# Altium PCB Route_Guide_and_Tuning.PcbDoc (part 4 of 8)
Units mil, origin at the board's own origin, x right, y up, seen from the top; angles counter-clockwise.
Board outline 3600 x 2300 mil, 14 copper layers (L1 TOP, L2_G, L3 SIG, L4_G, L4 SIG, L6_P, L7_G, L10_P, L11_P, L7 SIG, L13_P, L8 SIG, L15_G, L10 BOT), stack 89.291 mil thick; 4 components, 1934 nets, 2174 pads, 2165 vias.
Unrouted connection lines stored in the file: 123.
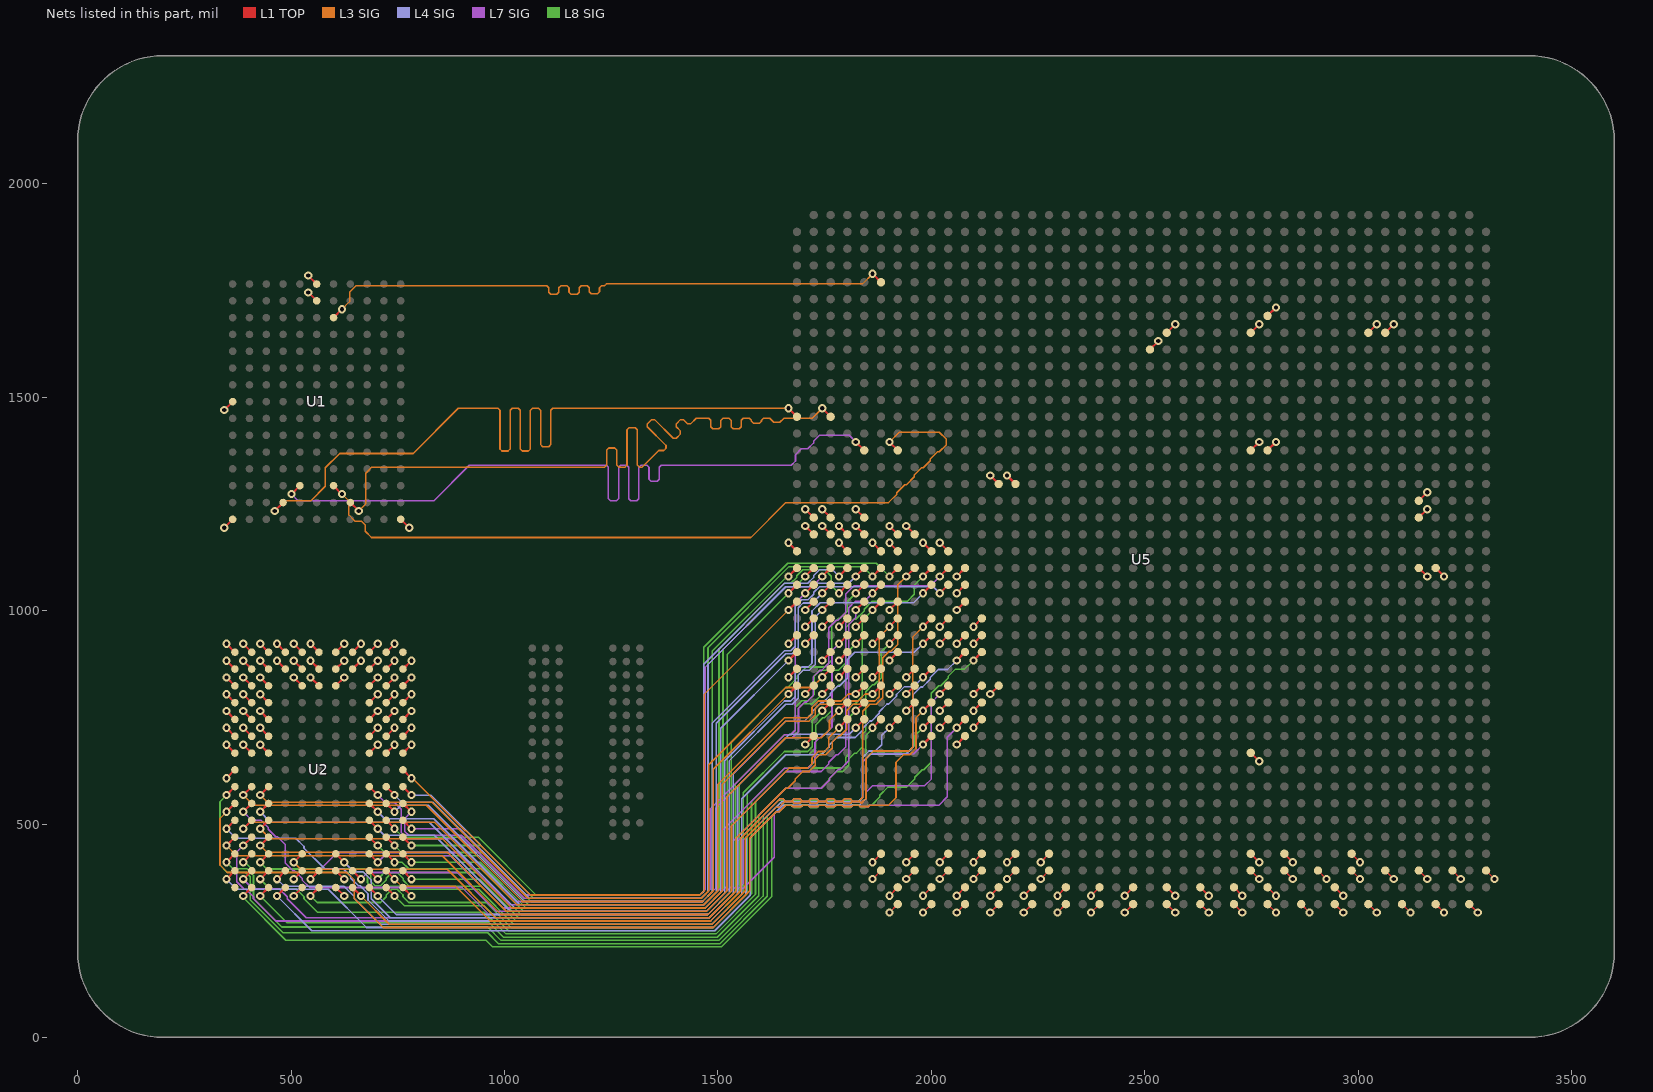
[diagram p16: the nets of this part, all layers, seen from the top]

## Via types
v1: diameter 19.4, hole 10, L1 TOP to L10 BOT, 2087 vias
v2: diameter 18.6, hole 10, L1 TOP to L10 BOT, tented both sides, 78 vias

## Nets (pads, with @x,y where several pads share a name; then routed paths per layer and width w, separated by ;. In a path a pad name is that pad's centre, name@x,y a point inside that pad or via, vN(x,y) a via of type N, cw(c..) or ccw(c..) an arc to the next point about the centre after c; other vN are vias at no path point) (continued)
MGT_TX_N10: U5.AN2 | length 27.8
  L1 TOP w3.8: U5.AN2@2945,351.65 v1(2964.69,331.97)
MGT_TX_N11: U5.AP4 | length 27.8
  L1 TOP w3.8: U5.AP4@2984.37,430.39 v1(3004.06,410.71)
MGT_TX_N12: U5.AG2 | length 27.8
  L1 TOP w3.8: U5.AG2@2708.78,351.65 v1(2728.47,331.97)
MGT_TX_N13: U5.AH4 | length 27.8
  L1 TOP w3.8: U5.AH4@2748.15,430.39 v1(2767.84,410.71)
MGT_TX_N14: U5.AJ2 | length 27.8
  L1 TOP w3.8: U5.AJ2@2787.52,351.65 v1(2807.21,331.97)
MGT_TX_N15: U5.AK4 | length 27.8
  L1 TOP w3.8: U5.AK4@2826.89,430.39 v1(2846.58,410.71)
MGT_TX_N16: U5.W2 | length 27.8
  L1 TOP w3.8: v1(2374.13,331.97) U5.W2@2393.82,351.65
MGT_TX_N17: U5.AA2 | length 27.8
  L1 TOP w3.8: v1(2452.87,331.97) U5.AA2@2472.56,351.65
MGT_TX_N18: U5.AC2 | length 27.8
  L1 TOP w3.8: U5.AC2@2551.3,351.65 v1(2570.99,331.97)
MGT_TX_N19: U5.AE2 | length 27.8
  L1 TOP w3.8: U5.AE2@2630.04,351.65 v1(2649.73,331.97)
MGT_TX_N20: U5.P4 | length 27.8
  L1 TOP w3.8: v1(2177.28,410.71) U5.P4@2196.97,430.39
MGT_TX_N21: U5.R2 | length 27.8
  L1 TOP w3.8: v1(2216.65,331.97) U5.R2@2236.34,351.65
MGT_TX_N22: U5.T4 | length 27.8
  L1 TOP w3.8: v1(2256.02,410.71) U5.T4@2275.71,430.39
MGT_TX_N23: U5.U2 | length 27.8
  L1 TOP w3.8: v1(2295.39,331.97) U5.U2@2315.08,351.65
MGT_TX_N24: U5.K4 | length 27.8
  L1 TOP w3.8: v1(2019.8,410.71) U5.K4@2039.49,430.39
MGT_TX_N25: U5.L2 | length 27.8
  L1 TOP w3.8: v1(2059.17,331.97) U5.L2@2078.86,351.65
MGT_TX_N26: U5.M4 | length 27.8
  L1 TOP w3.8: v1(2098.54,410.71) U5.M4@2118.23,430.39
MGT_TX_N27: U5.N2 | length 27.8
  L1 TOP w3.8: v1(2137.91,331.97) U5.N2@2157.6,351.65
MGT_TX_N28: U5.F4 | length 27.8
  L1 TOP w3.8: v1(1862.32,410.71) U5.F4@1882.01,430.39
MGT_TX_N29: U5.G2 | length 27.8
  L1 TOP w3.8: v1(1901.69,331.97) U5.G2@1921.38,351.65
MGT_TX_N30: U5.H4 | length 27.8
  L1 TOP w3.8: v1(1941.06,410.71) U5.H4@1960.75,430.39
MGT_TX_N31: U5.J2 | length 27.8
  L1 TOP w3.8: v1(1980.43,331.97) U5.J2@2000.12,351.65
MGT_TX_P0: U5.AW1 | length 27.8
  L1 TOP w3.8: U5.AW1@3181.22,312.28 v1(3200.91,292.6)
MGT_TX_P1: U5.AY3 | length 27.8
  L1 TOP w3.8: U5.AY3@3220.59,391.02 v1(3240.28,371.34)
MGT_TX_P2: U5.BA1 | length 27.8
  L1 TOP w3.8: U5.BA1@3259.96,312.28 v1(3279.65,292.6)
MGT_TX_P3: U5.BB3 | length 27.8
  L1 TOP w3.8: U5.BB3@3299.33,391.02 v1(3319.02,371.34)
MGT_TX_P4: U5.AR1 | length 27.8
  L1 TOP w3.8: U5.AR1@3023.74,312.28 v1(3043.43,292.6)
MGT_TX_P5: U5.AT3 | length 27.8
  L1 TOP w3.8: U5.AT3@3063.11,391.02 v1(3082.8,371.34)
MGT_TX_P6: U5.AU1 | length 27.8
  L1 TOP w3.8: U5.AU1@3102.48,312.28 v1(3122.17,292.6)
MGT_TX_P7: U5.AV3 | length 27.8
  L1 TOP w3.8: U5.AV3@3141.85,391.02 v1(3161.54,371.34)
MGT_TX_P8: U5.AL1 | length 27.8
  L1 TOP w3.8: U5.AL1@2866.26,312.28 v1(2885.95,292.6)
MGT_TX_P9: U5.AM3 | length 27.8
  L1 TOP w3.8: U5.AM3@2905.63,391.02 v1(2925.32,371.34)
MGT_TX_P10: U5.AN1 | length 27.8
  L1 TOP w3.8: U5.AN1@2945,312.28 v1(2964.69,292.6)
MGT_TX_P11: U5.AP3 | length 27.8
  L1 TOP w3.8: U5.AP3@2984.37,391.02 v1(3004.06,371.34)
MGT_TX_P12: U5.AG1 | length 27.8
  L1 TOP w3.8: U5.AG1@2708.78,312.28 v1(2728.47,292.6)
MGT_TX_P13: U5.AH3 | length 27.8
  L1 TOP w3.8: U5.AH3@2748.15,391.02 v1(2767.84,371.34)
MGT_TX_P14: U5.AJ1 | length 27.8
  L1 TOP w3.8: U5.AJ1@2787.52,312.28 v1(2807.21,292.6)
MGT_TX_P15: U5.AK3 | length 27.8
  L1 TOP w3.8: U5.AK3@2826.89,391.02 v1(2846.58,371.34)
MGT_TX_P16: U5.W1 | length 27.8
  L1 TOP w3.8: v1(2374.13,292.6) U5.W1@2393.82,312.28
MGT_TX_P17: U5.AA1 | length 27.8
  L1 TOP w3.8: v1(2452.87,292.6) U5.AA1@2472.56,312.28
MGT_TX_P18: U5.AC1 | length 27.8
  L1 TOP w3.8: U5.AC1@2551.3,312.28 v1(2570.99,292.6)
MGT_TX_P19: U5.AE1 | length 27.8
  L1 TOP w3.8: U5.AE1@2630.04,312.28 v1(2649.73,292.6)
MGT_TX_P20: U5.P3 | length 27.8
  L1 TOP w3.8: v1(2177.28,371.34) U5.P3@2196.97,391.02
MGT_TX_P21: U5.R1 | length 27.8
  L1 TOP w3.8: v1(2216.65,292.6) U5.R1@2236.34,312.28
MGT_TX_P22: U5.T3 | length 27.8
  L1 TOP w3.8: v1(2256.02,371.34) U5.T3@2275.71,391.02
MGT_TX_P23: U5.U1 | length 27.8
  L1 TOP w3.8: v1(2295.39,292.6) U5.U1@2315.08,312.28
MGT_TX_P24: U5.K3 | length 27.8
  L1 TOP w3.8: v1(2019.8,371.34) U5.K3@2039.49,391.02
MGT_TX_P25: U5.L1 | length 27.8
  L1 TOP w3.8: v1(2059.17,292.6) U5.L1@2078.86,312.28
MGT_TX_P26: U5.M3 | length 27.8
  L1 TOP w3.8: v1(2098.54,371.34) U5.M3@2118.23,391.02
MGT_TX_P27: U5.N1 | length 27.8
  L1 TOP w3.8: v1(2137.91,292.6) U5.N1@2157.6,312.28
MGT_TX_P28: U5.F3 | length 27.8
  L1 TOP w3.8: v1(1862.32,371.34) U5.F3@1882.01,391.02
MGT_TX_P29: U5.G1 | length 27.8
  L1 TOP w3.8: v1(1901.69,292.6) U5.G1@1921.38,312.28
MGT_TX_P30: U5.H3 | length 27.8
  L1 TOP w3.8: v1(1941.06,371.34) U5.H3@1960.75,391.02
MGT_TX_P31: U5.J1 | length 27.8
  L1 TOP w3.8: v1(1980.43,292.6) U5.J1@2000.12,312.28
MMC_CDN: 
MMC_CLK: 
MMC_CMD: 
MMC_DAT0: 
MMC_DAT1: 
MMC_DAT2: 
MMC_DAT3: 
MMC_DMAACK: 
MMC_DMAEOT: 
MMC_DMAREQ: 
MMC_PWRONN: 
MMC_WPN: 
MON_EN: 
N12V: 
NetC1_1: 
NetC13_2: 
NetC14_2: 
NetC17_1: 
NetC25_2: 
NetC26_1: 
NetC32_1: 
NetC37_1: 
NetC38_1: 
NetC39_2: 
NetC40_2: 
NetC41_2: 
NetC45_2: 
NetC48_1: 
NetC50_2: 
NetC51_2: 
NetC52_2: 
NetC56_2: 
NetC58_2: 
NetC77_2: 
NetC81_2: 
NetC91_2: 
NetC165_1: 
NetC176_2: 
NetC177_2: 
NetC181_2: 
NetC182_1: 
NetC187_1: 
NetC187_2: 
NetC189_2: 
NetC190_2: 
NetC192_2: 
NetC193_1: 
NetC193_2: 
NetC194_1: 
NetC194_2: 
NetC195_2: 
NetC205_2: 
NetC218_2: 
NetC264_2: 
NetC271_2: 
NetC298_1: 
NetC299_1: 
NetC300_1: 
NetC301_1: 
NetC500_2: 
NetC665_2: 
NetC705_1: 
NetC706_1: 
NetC707_1: 
NetC708_1: 
NetC720_1: 
NetC720_2: 
NetC721_2: 
NetC724_1: 
NetC724_2: 
NetC725_2: 
NetC726_2: 
NetC754_1: 
NetC755_1: 
NetC756_1: 
NetC757_1: 
NetC758_1: 
NetC759_1: 
NetC760_1: 
NetC761_1: 
NetC762_2: 
NetC766_1: 
NetC767_1: 
NetC768_1: 
NetC769_1: 
NetC770_1: 
NetC771_1: 
NetC772_1: 
NetC773_1: 
NetDS1_1: 
NetDS1_2: 
NetDS3_1: 
NetDS4_1: 
NetDS5_1: 
NetDS6_1: 
NetDS7_2: 
NetDS9_1: 
NetDS10_1: 
NetDS11_1: 
NetDS12_1: 
NetDS15_2: 
NetDS16_2: 
NetDS17_2: 
NetDS18_2: 
NetDS19_2: 
NetDS20_2: 
NetDS21_2: 
NetDS22_2: 
NetDS23_2: 
NetDS24_2: 
NetDS25_2: 
NetDS26_2: 
NetDS27_2: 
NetDS28_1: 
NetDS29_1: 
NetF1_2: 
NetF2_2: 
NetF3_2: 
NetF4_2: 
NetF5_2: 
NetF7_1: 
NetF8_2: 
NetF9_1: 
NetH12_1: 
NetH13_1: 
NetH14_1: 
NetH15_1: 
NetH16_1: 
NetH17_1: 
NetH18_1: 
NetH19_1: 
NetJ1_16: 
NetJ2_3: 
NetJ3_3: 
NetJ4_3: 
NetJ5_3: 
NetJ6_53: 
NetJ6_63: 
NetJ6_64: 
NetJ6_68: 
NetJ6_118: 
NetJ6_187: 
NetJ6_238: 
NetJ7_D17: 
NetJ8_D17: 
NetJ11_1: 
NetJP2_1: 
NetP3_5: 
NetP3_6: 
NetP6_2: 
NetP6_3: 
NetP6_4: 
NetP6_5: 
NetP7_4: 
NetP7_6: 
NetP7_8: 
NetP16_2: 
NetP16_5: 
NetP16_6: 
NetP16_11: 
NetP17_1: 
NetP17_3: 
NetP17_4: 
NetP17_7: 
NetP17_9: 
NetQ1_1: 
NetQ1_3: 
NetQ2_3: 
NetQ3_1: 
NetQ4_3: 
NetQ5_1: 
NetQ6_1: 
NetQ7_1: 
NetQ8_1: 
NetQ9_1: 
NetQ11_3: 
NetQ15_1: 
NetQ16_3: 
NetQ17_1: 
NetQ19_3: 
NetQ20_3: 
NetQ21_1: 
NetQ22_1: 
NetQ23_1: 
NetR3_1: 
NetR5_2: 
NetR6_1: 
NetR7_1: 
NetR10_1: 
NetR14_2: 
NetR17_1: 
NetR18_1: 
NetR23_2: 
NetR26_1: 
NetR29_1: 
NetR29_2: 
NetR37_1: 
NetR41_2: 
NetR44_1: 
NetR45_1: 
NetR46_1: 
NetR47_1: 
NetR48_1: 
NetR52_1: 
NetR52_2: 
NetR56_1: 
NetR56_2: 
NetR59_1: 
NetR59_2: 
NetR60_1: 
NetR61_1: 
NetR68_1: 
NetR69_1: 
NetR70_1: 
NetR71_1: 
NetR73_1: 
NetR73_2: 
NetR78_2: 
NetR79_1: 
NetR79_2: 
NetR82_2: 
NetR91_1: 
NetR91_2: 
NetR93_2: 
NetR95_2: 
NetR97_1: 
NetR98_1: 
NetR99_1: 
NetR100_1: 
NetR101_1: 
NetR102_1: 
NetR103_1: 
NetR104_1: 
NetR105_2: 
NetR107_2: 
NetR108_2: 
NetR109_2: 
NetR110_2: 
NetR111_2: 
NetR112_1: 
NetR113_2: 
NetR115_2: 
NetR124_1: 
NetR125_1: 
NetR126_1: 
NetR127_2: 
NetR128_1: 
NetR129_2: 
NetR130_1: 
NetR131_1: 
NetR132_1: 
NetR133_1: 
NetR134_1: 
NetR137_2: 
NetR138_1: 
NetR139_1: 
NetR143_1: 
NetR144_1: 
NetR147_1: 
NetR148_1: 
NetR149_1: 
NetR151_1: 
NetR152_1: 
NetR153_1: 
NetR154_1: 
NetR155_1: 
NetR156_1: 
NetR157_1: 
NetR158_1: 
NetR159_1: 
NetR160_1: 
NetR161_1: 
NetR162_1: 
NetR163_1: 
NetR164_1: 
NetR165_1: 
NetR166_1: 
NetR167_1: 
NetR168_1: 
NetR169_1: 
NetR170_1: 
NetR171_1: 
NetR172_1: 
NetR176_1: 
NetR181_1: 
NetR182_1: 
NetR183_1: 
NetR184_1: 
NetR185_1: 
NetR186_1: 
NetR187_1: 
NetR188_1: 
NetR189_1: 
NetR191_1: 
NetR200_1: 
NetR201_1: 
NetR201_2: 
NetR202_1: 
NetR202_2: 
NetR203_1: 
NetR203_2: 
NetR204_1: 
NetR204_2: 
NetR205_1: 
NetR205_2: 
NetR206_1: 
NetR206_2: 
NetR215_1: 
NetR215_2: 
NetR216_1: 
NetR216_2: 
NetR217_1: 
NetR217_2: 
NetR218_1: 
NetR218_2: 
NetR219_1: 
NetR220_1: 
NetR220_2: 
NetR221_1: 
NetR221_2: 
NetR222_1: 
NetR222_2: 
NetR223_1: 
NetR226_1: 
NetR227_1: 
NetR228_1: 
NetR228_2: 
NetR229_2: 
NetR231_2: 
NetR232_2: 
NetR233_2: 
NetR234_2: 
NetR236_2: 
NetR238_2: 
NetR239_2: 
NetR241_2: 
NetR242_2: 
NetR243_1: 
NetR245_2: 
NetR246_2: 
NetR250_2: 
NetR251_2: 
NetR255_1: U5.AH10 | length 27.8
  L1 TOP w5: U5.AH10@2748.15,666.61 v1(2767.84,646.93)
NetR264_1: U5.AR35 | length 27.8
  L1 TOP w5: U5.AR35@3023.74,1650.87 v1(3043.43,1670.55)
NetR265_2: U5.AT35 | length 27.8
  L1 TOP w5: U5.AT35@3063.11,1650.87 v1(3082.8,1670.55)
NetR266_1: U5.AV21 | length 27.8
  L1 TOP w5: U5.AV21@3141.85,1099.69 v1(3161.54,1080)
NetR267_2: U5.AW21 | length 27.8
  L1 TOP w5: U5.AW21@3181.22,1099.69 v1(3200.91,1080)
NetR268_2: U5.B11 | length 27.8
  L1 TOP w5: v1(1704.84,686.3) U5.B11@1724.53,705.98
NetR270_1: 
NetR271_2: 
NetR273_2: 
NetR284_2: 
NetR285_1: 
NetR286_1: 
NetR287_1: 
NetR317_1: U5.AV24 | length 27.8
  L1 TOP w5: U5.AV24@3141.85,1217.8 v1(3161.54,1237.48)
NetR318_2: U5.AV25 | length 27.8
  L1 TOP w5: U5.AV25@3141.85,1257.17 v1(3161.54,1276.85)
NetR319_1: U5.AC35 | length 27.8
  L1 TOP w5: U5.AC35@2551.3,1650.87 v1(2570.99,1670.55)
NetR320_1: U2.H11 | length 27.8
  L1 TOP w5: v1(348.86,607.12) U2.H11@368.54,626.81
NetR321_1: U1.H11 | length 27.8
  L1 TOP w5: v1(343.58,1469.64) U1.H11@363.27,1489.33
NetR322_1: U1.P6 | length 27.8
  L1 TOP w5: v1(540.43,1745.24) U1.P6@560.12,1725.55
NetR323_2: 
NetR324_2: 
NetR325_1: U5.AJ36 | length 27.8
  L1 TOP w5: U5.AJ36@2787.52,1690.24 v1(2807.21,1709.92)
NetR326_2: U5.AB34 | length 27.8
  L1 TOP w5: U5.AB34@2511.93,1611.5 v1(2531.62,1631.18)
NetR327_2: U5.AH35 | length 27.8
  L1 TOP w5: U5.AH35@2748.15,1650.87 v1(2767.84,1670.55)
NetR328_1: U5.AH28 | length 27.8
  L1 TOP w5: U5.AH28@2748.15,1375.28 v1(2767.84,1394.96)
NetR329_2: U5.AJ28 | length 27.8
  L1 TOP w5: U5.AJ28@2787.52,1375.28 v1(2807.21,1394.96)
NetR330_1: U5.P26 | length 27.8
  L1 TOP w5: v1(2177.28,1316.22) U5.P26@2196.97,1296.54
NetR331_2: U5.N26 | length 27.8
  L1 TOP w5: v1(2137.91,1316.22) U5.N26@2157.6,1296.54
NetR332_1: U5.L17 | length 27.8
  L1 TOP w5: v1(2059.17,922.52) U5.L17@2078.86,942.2
NetR333_2: U5.M17 | length 27.8
  L1 TOP w5: v1(2098.54,922.52) U5.M17@2118.23,942.2
NetR348_1: 
NetR353_1: 
NetR354_1: 
NetR355_1: 
NetR356_1: 
NetR357_1: 
NetR359_2: 
NetR360_1: U2.R6 | length 27.8
  L1 TOP w5: v1(545.71,922.09) U2.R6@565.39,902.4
NetR361_1: U1.R6 | length 27.8
  L1 TOP w5: v1(540.43,1784.61) U1.R6@560.12,1764.92
NetR364_1: 
NetR365_1: 
NetR368_1: 
NetR369_1: 
NetR371_1: 
NetR372_1: 
NetR373_1: U1.A11 | length 27.8
  L1 TOP w5: v1(343.58,1194.05) U1.A11@363.27,1213.74
NetR374_2: 
NetR375_2: 
NetR380_2: 
NetR382_2: 
NetR391_1: 
NetR392_1: U1.A1 | length 27.8
  L1 TOP w5: U1.A1@756.97,1213.74 v1(776.65,1194.05)
NetR393_1: U2.P6 | length 27.8
  L1 TOP w5: v1(545.71,882.72) U2.P6@565.39,863.03
NetR394_1: U2.A11
NetR395_1: U2.A1 | length 27.8
  L1 TOP w5: U2.A1@762.25,351.22 v1(781.93,331.53)
NetR396_1: 
NetR397_1: 
NetR398_1: 
NetR399_1: 
NetR400_2: 
NetR401_1: 
NetR402_2: 
NetR403_2: 
NetR404_2: 
NetR405_2: 
NetR406_2: 
NetR408_2: 
NetR409_2: 
NetR410_2: 
NetR411_1: 
NetR413_2: 
NetR414_2: 
NetR417_1: 
NetR419_1: 
NetR422_2: 
NetR423_2: 
NetR424_2: 
NetR425_2: 
NetR429_2: 
NetR430_1: 
NetR431_1: 
NetR432_1: 
NetR433_1: 
NetR434_1: 
NetR435_1: 
NetR438_1: 
NetR445_2: 
NetR447_1: 
NetR463_1: 
NetR470_1: 
NetR487_2: 
NetR490_2: 
NetR491_1: 
NetR495_1: 
NetTP2_1: 
NetTP10_1: 
NetTP11_1: 
NetTP31_1: 
NetTP32_1: 
NetTP33_1: 
NetTP34_1: 
NetTP37_1: 
NetTP38_1: 
NetTP39_1: 
NetU2_C27: 
NetU2_D27: 
NetU2_N3: 
NetU36_11: 
NetU40_24: 
NetU40_25: 
NetU70_3: 
NetU90_1: 
PB_CTRL: 
PB_IRQN: 
PCTRL_EN: 
PCTRL_ON: 
POWER_LEDN: 
POWER_PBN: 
PPC_GPIO0: 
PPC_GPIO1: 
PPC_GPIO2: 
PPC_GPIO3: 
PPC_HALT: 
PPC_KILLN: 
PPC_SCL: 
PPC_SDA: 
PPC_SYSERR: 
PPC_TCK: 
PPC_TDI: 
PPC_TDO: 
PPC_THERM_N: 
PPC_THERM_P: 
PPC_TMS: 
PPC_USBD_N: 
PPC_USBD_P: 
PPCGETH_CLK25: 
PPCLED_ACTIVITY: 
PPCLED_DUPLEX: 
PPCLED_LINK: 
PPCLED_LINK10: 
PPCLED_LINK100: 
PPCLED_LINK1000: 
PPCLED_RX: 
PPCLED_TX: 
PPCMDI_0_N: 
PPCMDI_0_P: 
PPCMDI_1_N: 
PPCMDI_1_P: 
PPCMDI_2_N: 
PPCMDI_2_P: 
PPCMDI_3_N: 
PPCMDI_3_P: 
PPCNET_AVDD: 
PPCNET_MDC: 
PPCNET_MDIO: 
PPCNET_TCK: 
PPCNET_TDI: 
PPCNET_TDO: 
PPCNET_TMS: 
PS_ENABLEN: 
QDR0.A0: U2.B4 U5.E19 | length 1810.6
  L1 TOP w5: U2.B4@644.14,390.59 v1(663.82,370.9) ; v1(1822.95,1001.26) U5.E19@1842.64,1020.94
  L7 SIG w3.8: v1(663.82,370.9) 679.22,386.3 889.49,386.3 980.12,295.67 1473.35,295.67 1534,356.32 1534,458.49 1659.09,583.59 1742.02,583.59 1762.02,603.59 1762.02,607.77 1782.02,627.77 1786.2,627.77 1806.58,648.15 1806.58,967.3 1822.95,983.67 v1(1822.95,1001.26)
QDR0.A1: U2.B8 U5.J15 | length 1996
  L1 TOP w5: v1(466.97,370.9) U2.B8@486.65,390.59 ; v1(1980.43,843.78) U5.J15@2000.12,863.46
  L4 SIG w3.8: v1(466.97,370.9) 483.34,354.53 623.23,354.53 648.42,329.34 648.42,325.15 708.3,265.27 1485.94,265.27 1555.76,335.09 1555.76,559 1659.09,662.33 1742.02,662.33 1760.09,680.4 1760.09,684.59 1778.16,702.66 1821.72,702.66 1838.96,719.89 1838.96,724.08 1856.19,741.32 1860.38,741.32 1878.15,759.09 1878.15,763.28 1896.06,781.19 1900.25,781.19 1918.37,799.31 1918.37,803.5 1936.81,821.93 1958.59,821.93 v1(1980.43,843.78)
QDR0.A2: U2.C5 U5.J17 | length 1952
  L1 TOP w5: U2.C5@604.76,429.96 v1(624.45,410.27) ; v1(1980.43,922.52) U5.J17@2000.12,942.2
  L4 SIG w3.8: v1(624.45,410.27) 646.72,388 668.5,388 687.79,368.71 687.79,325.15 732.47,280.47 1479.65,280.47 1535.98,336.8 1535.98,617.95 1659.09,741.07 1702.65,741.07 1721.95,760.37 1721.95,764.56 1741.25,783.86 1745.44,783.86 1762.71,801.13 1762.71,805.32 1780.22,822.83 1784.41,822.83 1802.93,841.35 1802.93,884.91 1820.3,902.28 1960.19,902.28 v1(1980.43,922.52)
QDR0.A3: U2.C7 U5.G18 | length 1986.9
  L1 TOP w5: v1(506.34,410.27) U2.C7@526.02,429.96 ; v1(1901.69,961.89) U5.G18@1921.38,981.57
  L3 SIG w3.8: v1(506.34,410.27) 522.7,393.92 865.74,393.92 979.19,280.47 1479.65,280.47 1542.57,343.4 1542.57,467.07 1659.09,583.59 1663.28,583.59 1680.87,601.18 1680.87,605.37 1698.46,622.96 1713.4,622.96 1727.85,637.41 1727.85,652.35 1737.83,662.33 1752.77,662.33 1767.55,677.11 1767.55,692.04 1782.33,706.82 1786.52,706.82 1801.42,721.73 1801.42,765.29 1816.57,780.44 1831.51,780.44 1839.11,788.04 1867.73,788.04 1878.06,798.37 1878.06,938.26 v1(1901.69,961.89)
QDR0.A4: U2.N5 U5.G19 | length 55.7
  L1 TOP w5: U2.N5@604.76,823.66 v1(624.45,843.35) ; v1(1901.69,1001.26) U5.G19@1921.38,1020.94
QDR0.A5: U2.N6 U5.G16 | length 55.7
  L1 TOP w5: v1(545.71,843.35) U2.N6@565.39,823.66 ; v1(1901.69,883.15) U5.G16@1921.38,902.83
QDR0.A6: U2.N7 U5.E18 | length 55.7
  L1 TOP w5: v1(506.34,843.35) U2.N7@526.02,823.66 ; v1(1822.95,961.89) U5.E18@1842.64,981.57
QDR0.A7: U2.P4 U5.F17 | length 55.7
  L1 TOP w5: U2.P4@644.14,863.03 v1(663.82,882.72) ; v1(1862.32,922.52) U5.F17@1882.01,942.2
QDR0.A8: U2.P5 U5.K18 | length 55.7
  L1 TOP w5: U2.P5@604.76,863.03 v1(624.45,882.72) ; v1(2019.8,961.89) U5.K18@2039.49,981.57
QDR0.A9: U2.P7 U5.C18 | length 55.7
  L1 TOP w5: v1(506.34,882.72) U2.P7@526.02,863.03 ; v1(1744.21,961.89) U5.C18@1763.9,981.57
QDR0.A10: U2.P8 U5.A17 | length 55.7
  L1 TOP w5: v1(466.97,882.72) U2.P8@486.65,863.03 ; v1(1665.47,922.52) U5.A17@1685.16,942.2
QDR0.A11: U2.A9 U5.G17 | length 2083.5
  L1 TOP w5: v1(427.6,331.53) U2.A9@447.28,351.22 ; v1(1901.69,922.52) U5.G17@1921.38,942.2
  L8 SIG w3.8: v1(427.6,331.53) 490.05,269.09 963.68,269.09 997.89,234.87 1498.54,234.87 1595.85,332.19 1595.85,520.35 1659.09,583.59 1742.02,583.59 1759.61,601.18 1759.61,605.37 1777.2,622.96 1792.14,622.96 1806.58,637.4 1806.58,652.34 1820.37,666.13 1824.56,666.13 1838.35,679.92 1838.35,710.25 1845.95,717.85 1845.95,809.82 1862.14,826.01 1866.33,826.01 1882.52,842.2 1882.52,903.35 v1(1901.69,922.52)
QDR0.A12: U2.R3 U5.M18 | length 55.7
  L1 TOP w5: U2.R3@683.51,902.4 v1(703.19,922.09) ; v1(2098.54,961.89) U5.M18@2118.23,981.57
QDR0.A13: U2.R4 U5.B19 | length 55.7
  L1 TOP w5: U2.R4@644.14,902.4 v1(663.82,922.09) ; v1(1704.84,1001.26) U5.B19@1724.53,1020.94
QDR0.A14: U2.R5 U5.B17 | length 55.7
  L1 TOP w5: U2.R5@604.76,902.4 v1(624.45,922.09) ; v1(1704.84,922.52) U5.B17@1724.53,942.2
QDR0.A15: U2.R7 U5.B18 | length 55.7
  L1 TOP w5: v1(506.34,922.09) U2.R7@526.02,902.4 ; v1(1704.84,961.89) U5.B18@1724.53,981.57
QDR0.A16: U2.R8 U5.D18 | length 55.7
  L1 TOP w5: v1(466.97,922.09) U2.R8@486.65,902.4 ; v1(1783.58,961.89) U5.D18@1803.27,981.57
QDR0.A17: U2.R9 U5.K17 | length 55.7
  L1 TOP w5: v1(427.6,922.09) U2.R9@447.28,902.4 ; v1(2019.8,922.52) U5.K17@2039.49,942.2
QDR0.A18: U2.A3 U5.C19 | length 1688.6
  L1 TOP w5: U2.A3@683.51,351.22 v1(703.19,331.53) ; v1(1744.21,1001.26) U5.C19@1763.9,1020.94
  L4 SIG w3.8: v1(703.19,331.53) 746.65,288.07 1476.5,288.07 1526.08,337.66 1526.08,647.43 1659.09,780.44 1674.03,780.44 1688.48,794.89 1688.48,849.2 1699.42,860.14 1714.36,860.14 1727.86,873.64 1727.86,984.9 v1(1744.21,1001.26)
QDR0.A19: U2.A10 U5.M16 | length 2334.7
  L1 TOP w5: v1(388.23,331.53) U2.A10@407.91,351.22 ; v1(2098.54,883.15) U5.M16@2118.23,902.83
  L8 SIG w3.8: v1(388.23,331.53) 388.23,327.63 487.88,227.98 956.58,227.98 972.49,212.07 1507.98,212.07 1625.65,329.73 1625.65,517.78 1636.65,528.78 1643.65,528.78 1659.09,544.22 1671.85,544.22 1678.31,537.75 1692,537.75 1698.46,544.22 1711.22,544.22 1717.68,537.75 1731.37,537.75 1737.83,544.22 1750.59,544.22 1757.05,537.75 1770.74,537.75 1777.2,544.22 1789.96,544.22 1796.42,537.75 1810.11,537.75 1816.57,544.22 1829.33,544.22 1835.79,537.75 1844.73,537.75 1851.19,544.22 1860.13,544.22 1879.32,563.41 1879.32,567.59 1898.51,586.78 1942.07,586.78 1960.71,605.43 1960.71,609.62 1978.28,627.18 1982.46,627.18 2000.01,644.72 2000.01,806.39 2017.51,823.9 2021.7,823.9 2039.15,841.35 2039.15,845.54 2056.52,862.91 2078.3,862.91 v1(2098.54,883.15)
QDR0.A20: U2.A2 U5.F19 | length 1782.8
  L1 TOP w5: U2.A2@722.88,351.22 v1(742.56,331.53) ; v1(1862.32,1001.26) U5.F19@1882.01,1020.94
  L8 SIG w3.8: v1(742.56,331.53) 765.56,308.53 951.12,308.53 1009.59,250.07 1492.24,250.07 1578.53,336.36 1578.53,553.14 1655.94,630.56 1710.25,630.56 1725.32,645.62 1725.32,649.81 1740.38,664.88 1744.57,664.88 1760.15,680.46 1760.15,684.65 1777.75,702.24 1781.93,702.24 1799,719.3 1799,762.86 1816.58,780.45 1820.77,780.45 1838.35,798.03 1838.35,977.29 v1(1862.32,1001.26)
QDR0.BWN0: U2.B7 | length 27.8
  L1 TOP w5: v1(506.34,370.9) U2.B7@526.02,390.59
QDR0.BWN1: U2.A7 | length 27.8
  L1 TOP w5: v1(506.34,331.53) U2.A7@526.02,351.22
QDR0.BWN2: U2.A5 | length 27.8
  L1 TOP w5: U2.A5@604.76,351.22 v1(624.45,331.53)
QDR0.BWN3: U2.B5 | length 27.8
  L1 TOP w5: U2.B5@604.76,390.59 v1(624.45,370.9)
QDR0.D0: U2.P10 U5.C16 | length 55.7
  L1 TOP w5: v1(388.23,882.72) U2.P10@407.91,863.03 ; v1(1744.21,883.15) U5.C16@1763.9,902.83
QDR0.D1: U2.N11 U5.N14 | length 55.7
  L1 TOP w5: v1(348.86,843.35) U2.N11@368.54,823.66 ; v1(2137.91,804.41) U5.N14@2157.6,824.09
QDR0.D2: U2.M11 U5.H13 | length 55.7
  L1 TOP w5: v1(348.86,803.98) U2.M11@368.54,784.29 ; v1(1941.06,765.04) U5.H13@1960.75,784.72
QDR0.D3: U2.K10 U5.K12 | length 55.7
  L1 TOP w5: v1(388.23,725.24) U2.K10@407.91,705.55 ; v1(2019.8,725.67) U5.K12@2039.49,745.35
QDR0.D4: U2.J11 U5.K13 | length 55.7
  L1 TOP w5: v1(348.86,685.87) U2.J11@368.54,666.18 ; v1(2019.8,765.04) U5.K13@2039.49,784.72
QDR0.D5: U2.G11 U5.J12 | length 2382.1
  L1 TOP w5: v1(348.86,567.75) U2.G11@368.54,587.44 ; v1(1980.43,725.67) U5.J12@2000.12,745.35
  L8 SIG w3.8: v1(348.86,567.75) 333.46,552.35 333.46,403.89 350.09,387.26 393.65,387.26 404.6,376.31 404.6,322.01 481.25,245.36 960.51,245.36 986.2,219.67 1504.83,219.67 1615.72,330.55 1615.72,518.59 1645.62,548.5 1652.63,548.5 1655.94,545.19 1675,545.19 1678.31,548.5 1692,548.5 1695.31,545.19 1714.37,545.19 1717.68,548.5 1731.37,548.5 1734.68,545.19 1753.74,545.19 1757.05,548.5 1770.74,548.5 1774.05,545.19 1793.11,545.19 1796.42,548.5 1810.11,548.5 1813.42,545.19 1832.48,545.19 1846.92,559.63 1846.92,653.31 1862.63,669.01 1945.56,669.01 1961.26,684.72 1961.26,706.5 v1(1980.43,725.67)
QDR0.D6: U2.E10 U5.E14 | length 1935.9
  L1 TOP w5: v1(388.23,489.01) U2.E10@407.91,508.7 ; v1(1822.95,804.41) U5.E14@1842.64,824.09
  L3 SIG w3.8: v1(388.23,489.01) 403.63,504.41 835.93,504.41 1029.47,310.87 1467.06,310.87 1499.7,343.52 1499.7,592.42 1655.94,748.67 1710.25,748.67 1720.25,758.67 1720.25,773.6 1734.68,788.04 1788.99,788.04 1805.36,804.41 v1(1822.95,804.41)
QDR0.D7: U2.D11 U5.D12 | length 1849.3
  L1 TOP w5: v1(348.86,449.64) U2.D11@368.54,469.33 ; v1(1783.58,725.67) U5.D12@1803.27,745.35
  L3 SIG w3.8: v1(348.86,449.64) 372.82,425.68 854.15,425.68 991.76,288.07 1476.5,288.07 1531.85,343.43 1531.85,495.72 1667.26,631.13 1710.82,631.13 1720.25,640.56 1720.25,655.49 1734.68,669.93 1749.62,669.93 1759.82,680.13 1759.82,701.91 v1(1783.58,725.67)
QDR0.D8: U2.C11 U5.F12 | length 2089
  L1 TOP w5: v1(348.86,410.27) U2.C11@368.54,429.96 ; v1(1862.32,725.67) U5.F12@1882.01,745.35
  L8 SIG w3.8: v1(348.86,410.27) 364.27,394.86 396.79,394.86 412.2,379.46 412.2,325.15 478.55,258.8 960.51,258.8 992.05,227.27 1501.69,227.27 1605.78,331.37 1605.78,519.41 1642.48,556.1 1655.78,556.1 1659.09,552.79 1671.85,552.79 1675.17,556.1 1695.15,556.1 1698.46,552.79 1711.22,552.79 1714.54,556.1 1734.52,556.1 1737.83,552.79 1750.59,552.79 1753.91,556.1 1773.89,556.1 1777.2,552.79 1789.96,552.79 1793.28,556.1 1813.26,556.1 1816.57,552.79 1829.33,552.79 1839.32,562.78 1839.32,656.45 1845.95,663.08 1845.95,707.1 1862.32,723.47 v1(1862.32,725.67)
QDR0.D9: U2.N10 U5.H15 | length 55.7
  L1 TOP w5: v1(388.23,843.35) U2.N10@407.91,823.66 ; v1(1941.06,843.78) U5.H15@1960.75,863.46
QDR0.D10: U2.M9 U5.A15 | length 55.7
  L1 TOP w5: v1(427.6,803.98) U2.M9@447.28,784.29 ; v1(1665.47,843.78) U5.A15@1685.16,863.46
QDR0.D11: U2.L9 U5.E15 | length 55.7
  L1 TOP w5: v1(427.6,764.61) U2.L9@447.28,744.92 ; v1(1822.95,843.78) U5.E15@1842.64,863.46
QDR0.D12: U2.J9 U5.B14 | length 55.7
  L1 TOP w5: v1(427.6,685.87) U2.J9@447.28,666.18 ; v1(1704.84,804.41) U5.B14@1724.53,824.09
QDR0.D13: U2.G10 U5.A14 | length 1804
  L1 TOP w5: v1(388.23,567.75) U2.G10@407.91,587.44 ; v1(1665.47,804.41) U5.A14@1685.16,824.09
  L3 SIG w3.8: v1(388.23,567.75) 412.2,543.78 816.73,543.78 1042.04,318.48 1463.91,318.48 1488.98,343.55 1488.98,627.92 v1(1665.47,804.41)
QDR0.D14: U2.F9 U5.A16 | length 1852.3
  L1 TOP w5: v1(427.6,528.38) U2.F9@447.28,548.07 ; v1(1665.47,883.15) U5.A16@1685.16,902.83
  L4 SIG w3.8: v1(427.6,528.38) 451.57,504.41 823.51,504.41 1024.65,303.27 1470.2,303.27 1506.29,339.36 1506.29,723.97 v1(1665.47,883.15)
QDR0.D15: U2.D10 U5.L12 | length 2216.9
  L1 TOP w5: v1(388.23,449.64) U2.D10@407.91,469.33 ; v1(2059.17,725.67) U5.L12@2078.86,745.35
  L7 SIG w3.8: v1(388.23,449.64) 372.83,434.24 372.83,364.52 390.42,346.93 394.61,346.93 412.2,329.34 412.2,325.15 464.48,272.87 1482.8,272.87 1632.24,422.31 1632.24,524.37 1636.24,528.37 1643.24,528.37 1659.09,544.22 1671.85,544.22 1675.17,540.9 1695.15,540.9 1698.46,544.22 1711.22,544.22 1714.54,540.9 1734.52,540.9 1737.83,544.22 1750.59,544.22 1753.91,540.9 1773.89,540.9 1777.2,544.22 1789.96,544.22 1793.28,540.9 1813.26,540.9 1816.57,544.22 1829.33,544.22 1832.65,540.9 1852.63,540.9 1855.94,544.22 2017.61,544.22 2036.9,563.51 2036.9,703.4 v1(2059.17,725.67)
QDR0.D16: U2.C9 U5.C14 | length 1868.3
  L1 TOP w5: v1(427.6,410.27) U2.C9@447.28,429.96 ; v1(1744.21,804.41) U5.C14@1763.9,824.09
  L8 SIG w3.8: v1(427.6,410.27) 443.36,394.51 672.74,394.51 686.82,380.43 686.82,365.49 696.81,355.5 709.57,355.5 722.88,368.81 722.88,373 736.18,386.3 748.94,386.3 762.72,372.52 762.72,368.33 776.51,354.55 945.45,354.55 1027.13,272.87 1482.8,272.87 1550,340.08 1550,592.61 1659.09,701.7 1674.03,701.7 1688.49,716.15 1688.49,770.46 1699.43,781.41 1721.21,781.41 v1(1744.21,804.41)
QDR0.D17: U2.B9 U5.E13 | length 1909
  L1 TOP w5: v1(427.6,370.9) U2.B9@447.28,390.59 ; v1(1822.95,765.04) U5.E13@1842.64,784.72
  L8 SIG w3.8: v1(427.6,370.9) 449.87,348.63 511.02,348.63 530.31,329.34 530.31,325.15 562.08,293.38 952.83,293.38 1003.74,242.47 1495.39,242.47 1588.03,335.11 1588.03,551.9 1659.09,622.96 1713.4,622.96 1721.57,631.13 1789.56,631.13 1798.98,640.55 1798.98,655.48 1806.6,663.1 1806.6,748.68 v1(1822.95,765.04)
QDR0.D18: U2.B3 U5.E20 | length 1808.8
  L1 TOP w5: U2.B3@683.51,390.59 v1(703.19,370.9) ; v1(1822.95,1040.63) U5.E20@1842.64,1060.32
  L8 SIG w3.8: v1(703.19,370.9) 726.19,393.9 765.77,393.9 773.36,386.32 940.58,386.32 1038.82,288.07 1476.5,288.07 1530.98,342.56 1530.98,691.7 1659.09,819.81 1663.28,819.81 1685.38,841.91 1685.38,846.09 1707.02,867.74 1750.58,867.74 1766.4,883.56 1766.4,966.49 1782.22,982.31 1786.41,982.31 1802.71,998.61 1802.71,1020.39 v1(1822.95,1040.63)
QDR0.D19: U2.C3 U5.F20 | length 1843.3
  L1 TOP w5: U2.C3@683.51,429.96 v1(703.19,410.27) ; v1(1862.32,1040.63) U5.F20@1882.01,1060.32
  L7 SIG w3.8: v1(703.19,410.27) 718.59,425.67 874.33,425.67 996.73,303.27 1470.2,303.27 1521.14,354.21 1521.14,485 1659.09,622.96 1742.02,622.96 1759.61,640.55 1759.61,644.74 1777.2,662.33 1781.39,662.33 1798.98,679.92 1798.98,970.45 1806.58,978.05 1806.58,1006.67 1822.07,1022.16 1843.85,1022.16 v1(1862.32,1040.63)
QDR0.D20: U2.D2 U5.A21 | length 1678.7
  L1 TOP w5: U2.D2@722.88,469.33 v1(742.56,449.64) ; v1(1665.47,1080) U5.A21@1685.16,1099.69
  L8 SIG w3.8: v1(742.56,449.64) 758.92,433.29 947.4,433.29 1062.21,318.48 1463.91,318.48 1486.62,341.18 1486.62,905.05 1661.57,1080 v1(1665.47,1080)
QDR0.D21: U2.F3 U5.C20 | length 1775.7
  L1 TOP w5: U2.F3@683.51,548.07 v1(703.19,528.38) ; v1(1744.21,1040.63) U5.C20@1763.9,1060.32
  L4 SIG w3.8: v1(703.19,528.38) 719.56,512.01 834.53,512.01 1035.67,310.87 1467.05,310.87 1496.4,340.22 1496.4,735.86 1659.09,898.55 1674.03,898.55 1688.48,913 1688.48,1006.68 1699.42,1017.62 1721.2,1017.62 v1(1744.21,1040.63)
QDR0.D22: U2.G2 U5.E21 | length 1859.9
  L1 TOP w5: U2.G2@722.88,587.44 v1(742.56,567.75) ; v1(1822.95,1080) U5.E21@1842.64,1099.69
  L4 SIG w3.8: v1(742.56,567.75) 758.93,551.38 832.4,551.38 1057.71,326.08 1460.76,326.08 1476.61,341.93 1476.61,873.55 1659.09,1056.03 1713.4,1056.03 1721,1063.63 1806.58,1063.63 v1(1822.95,1080)
QDR0.D23: U2.J3 U5.L19 | length 55.7
  L1 TOP w5: U2.J3@683.51,666.18 v1(703.19,685.87) ; v1(2059.17,1001.26) U5.L19@2078.86,1020.94
QDR0.D24: U2.L3 U5.G23 | length 55.7
  L1 TOP w5: U2.L3@683.51,744.92 v1(703.19,764.61) ; v1(1901.69,1198.11) U5.G23@1921.38,1178.43
QDR0.D25: U2.M3 U5.L21 | length 55.7
  L1 TOP w5: U2.M3@683.51,784.29 v1(703.19,803.98) ; v1(2059.17,1080) U5.L21@2078.86,1099.69
QDR0.D26: U2.N2 U5.D23 | length 55.7
  L1 TOP w5: U2.N2@722.88,823.66 v1(742.56,843.35) ; v1(1783.58,1198.11) U5.D23@1803.27,1178.43
QDR0.D27: U2.C1 U5.B21 | length 1674.9
  L1 TOP w5: U2.C1@762.25,429.96 v1(781.93,410.27) ; v1(1704.84,1080) U5.B21@1724.53,1099.69
  L8 SIG w3.8: v1(781.93,410.27) 943.51,410.27 1050.51,303.27 1470.2,303.27 1511.97,345.04 1511.97,908.9 1659.09,1056.03 1680.87,1056.03 v1(1704.84,1080)
QDR0.D28: U2.D1 U5.F21 | length 1853.1
  L1 TOP w5: U2.D1@762.25,469.33 v1(781.93,449.64) ; v1(1862.32,1080) U5.F21@1882.01,1099.69
  L8 SIG w3.8: v1(781.93,449.64) 944.49,449.64 1068.05,326.08 1460.76,326.08 1476.68,342 1476.68,912.99 1666.69,1103 1839.32,1103 v1(1862.32,1080)
QDR0.D29: U2.E2 U5.G21 | length 1948.1
  L1 TOP w5: U2.E2@722.88,508.7 v1(742.56,489.01) ; v1(1901.69,1080) U5.G21@1921.38,1099.69
  L8 SIG w3.8: v1(742.56,489.01) 762.25,469.33 938.25,469.33 1073.9,333.68 1457.61,333.68 1466.75,342.82 1466.75,913.81 1663.54,1110.6 1871.09,1110.6 v1(1901.69,1080)
QDR0.D30: U2.G1 U5.D21 | length 1790.1
  L1 TOP w5: U2.G1@762.25,587.44 v1(781.93,567.75) ; v1(1783.58,1080) U5.D21@1803.27,1099.69
  L4 SIG w3.8: v1(781.93,567.75) 827,567.75 1061.08,333.68 1457.61,333.68 1466.72,342.78 1466.72,874.4 1655.94,1063.63 1710.25,1063.63 1724.04,1077.42 1724.04,1081.61 1737.83,1095.4 1768.18,1095.4 v1(1783.58,1080)
QDR0.D31: U2.J1 U5.K22 | length 55.7
  L1 TOP w5: U2.J1@762.25,666.18 v1(781.93,685.87) ; v1(2019.8,1158.74) U5.K22@2039.49,1139.06
QDR0.D32: U2.K2 U5.L20 | length 55.7
  L1 TOP w5: U2.K2@722.88,705.55 v1(742.56,725.24) ; v1(2059.17,1040.63) U5.L20@2078.86,1060.32
QDR0.D33: U2.M1 U5.B23 | length 55.7
  L1 TOP w5: U2.M1@762.25,784.29 v1(781.93,803.98) ; v1(1704.84,1198.11) U5.B23@1724.53,1178.43
QDR0.D34: U2.N1 U5.D22 | length 55.7
  L1 TOP w5: U2.N1@762.25,823.66 v1(781.93,843.35) ; v1(1783.58,1158.74) U5.D22@1803.27,1139.06
QDR0.D35: U2.P2 U5.E24 | length 55.7
  L1 TOP w5: U2.P2@722.88,863.03 v1(742.56,882.72) ; v1(1822.95,1237.48) U5.E24@1842.64,1217.8
QDR0.DOFFN: U2.H1 U5.A19 | length 1598.3
  L1 TOP w5: U2.H1@762.25,626.81 v1(781.93,607.12) ; v1(1665.47,1001.26) U5.A19@1685.16,1020.94
  L3 SIG w3.8: v1(781.93,607.12) 784.31,607.12 907.31,484.12 909.79,484.12 1060.24,333.68 1457.61,333.68 1467.54,343.61 1467.54,803.33 v1(1665.47,1001.26)
QDR0.K: U2.B6 U5.D17 | length 1830.6
  L1 TOP w5: v1(545.71,370.9) U2.B6@565.39,390.59 ; v1(1783.58,922.52) U5.D17@1803.27,942.2
  L7 SIG w3.8: v1(545.71,370.9) 608.08,433.27 890.93,433.27 1013.33,310.87 1467.06,310.87 1508.27,352.09 1508.27,482.89 1655.94,630.56 1710.25,630.56 1727.49,647.8 1727.49,691.35 1744.72,708.59 1748.91,708.59 1767.21,726.89 1767.21,906.15 v1(1783.58,922.52)
QDR0.KN: U2.A6 U5.E17 | length 1899.9
  L1 TOP w5: v1(545.71,331.53) U2.A6@565.39,351.22 ; v1(1822.95,922.52) U5.E17@1842.64,942.2
  L8 SIG w3.8: v1(545.71,331.53) 561.11,316.13 709.57,316.13 722.88,329.44 722.88,333.63 736.18,346.93 748.94,346.93 762.25,333.63 762.25,329.44 775.55,316.13 956.97,316.13 1015.43,257.67 1489.09,257.67 1569.02,337.6 1569.02,572.25 1659.09,662.33 1713.4,662.33 1728.81,677.74 1728.81,732.05 1745.42,748.65 1749.61,748.65 1766.21,765.26 1766.21,808.82 1783.57,826.17 1787.76,826.17 1806.6,845.01 1806.6,906.16 v1(1822.95,922.52)
QDR0.Q0: U2.P11 U5.G14 | length 55.7
  L1 TOP w5: v1(348.86,882.72) U2.P11@368.54,863.03 ; v1(1901.69,804.41) U5.G14@1921.38,824.09
QDR0.Q1: U2.M10 U5.M14 | length 55.7
  L1 TOP w5: v1(388.23,803.98) U2.M10@407.91,784.29 ; v1(2098.54,804.41) U5.M14@2118.23,824.09
QDR0.Q2: U2.L11 U5.M12 | length 55.7
  L1 TOP w5: v1(348.86,764.61) U2.L11@368.54,744.92 ; v1(2098.54,725.67) U5.M12@2118.23,745.35
QDR0.Q3: U2.K11 U5.M13 | length 55.7
  L1 TOP w5: v1(348.86,725.24) U2.K11@368.54,705.55 ; v1(2098.54,765.04) U5.M13@2118.23,784.72
QDR0.Q4: U2.J10 U5.H14 | length 55.7
  L1 TOP w5: v1(388.23,685.87) U2.J10@407.91,666.18 ; v1(1941.06,804.41) U5.H14@1960.75,824.09
QDR0.Q5: U2.F11 U5.J13 | length 2306.6
  L1 TOP w5: v1(348.86,528.38) U2.F11@368.54,548.07 ; v1(1980.43,765.04) U5.J13@2000.12,784.72
  L3 SIG w3.8: v1(348.86,528.38) 333.46,512.98 333.46,403.89 351.05,386.3 630.83,386.3 648.42,368.71 648.42,325.15 715.9,257.67 1489.09,257.67 1574.73,343.31 1574.73,466.86 1636.73,528.86 1643.73,528.86 1659.09,544.22 1671.85,544.22 1675.17,540.9 1695.15,540.9 1698.46,544.22 1711.22,544.22 1714.54,540.9 1734.52,540.9 1737.83,544.22 1750.59,544.22 1753.91,540.9 1773.89,540.9 1777.2,544.22 1789.96,544.22 1793.28,540.9 1813.26,540.9 1816.57,544.22 1829.33,544.22 1832.65,540.9 1852.63,540.9 1855.94,544.22 1899.5,544.22 1917.09,561.81 1917.09,644.74 1934.68,662.33 1949.62,662.33 1964.07,676.78 1964.07,748.68 v1(1980.43,765.04)
QDR0.Q6: U2.E11 U5.E12 | length 1968.4
  L1 TOP w5: v1(348.86,489.01) U2.E11@368.54,508.7 ; v1(1822.95,725.67) U5.E12@1842.64,745.35
  L4 SIG w3.8: v1(348.86,489.01) 371.13,466.74 511.02,466.74 530.31,447.45 530.31,443.26 578.7,394.87 622.26,394.87 639.85,377.28 639.85,373.09 657.93,355.02 662.12,355.02 680.19,336.94 680.19,322.01 729.33,272.87 1482.8,272.87 1545.87,335.95 1545.87,588.48 1667.65,710.26 1807.54,710.26 v1(1822.95,725.67)
QDR0.Q7: U2.C10 U5.C13 | length 1866.3
  L1 TOP w5: v1(388.23,410.27) U2.C10@407.91,429.96 ; v1(1744.21,765.04) U5.C13@1763.9,784.72
  L8 SIG w3.8: v1(388.23,410.27) 392.13,410.27 415.49,386.91 669.59,386.91 679.22,377.28 679.22,362.35 693.66,347.9 726.4,347.9 733.03,354.53 765.77,354.53 773.36,346.95 939.61,346.95 1021.28,265.27 1485.94,265.27 1559.51,338.84 1559.51,573.49 1655.94,669.93 1710.25,669.93 1721.21,680.89 1721.21,742.04 v1(1744.21,765.04)
QDR0.Q8: U2.B11 U5.G12 | length 1995.6
  L1 TOP w5: v1(348.86,370.9) U2.B11@368.54,390.59 ; v1(1901.69,725.67) U5.G12@1921.38,745.35
  L4 SIG w3.8: v1(348.86,370.9) 372.83,346.93 587.27,346.93 676.53,257.67 1489.09,257.67 1565.66,334.24 1565.66,468.54 1648.94,551.82 1828.36,551.82 1838.35,561.81 1838.35,655.48 1853.76,670.89 1868.69,670.89 1883.7,685.9 1883.7,707.68 v1(1901.69,725.67)
QDR0.Q9: U2.P9 U5.F15 | length 55.7
  L1 TOP w5: v1(427.6,882.72) U2.P9@447.28,863.03 ; v1(1862.32,843.78) U5.F15@1882.01,863.46
QDR0.Q10: U2.N9 U5.D16 | length 55.7
  L1 TOP w5: v1(427.6,843.35) U2.N9@447.28,823.66 ; v1(1783.58,883.15) U5.D16@1803.27,902.83
QDR0.Q11: U2.L10 U5.L11 | length 55.7
  L1 TOP w5: v1(388.23,764.61) U2.L10@407.91,744.92 ; v1(2059.17,686.3) U5.L11@2078.86,705.98
QDR0.Q12: U2.K9 U5.D15 | length 55.7
  L1 TOP w5: v1(427.6,725.24) U2.K9@447.28,705.55 ; v1(1783.58,843.78) U5.D15@1803.27,863.46
QDR0.Q13: U2.G9 U5.C15 | length 1859.9
  L1 TOP w5: v1(427.6,567.75) U2.G9@447.28,587.44 ; v1(1744.21,843.78) U5.C15@1763.9,863.46
  L3 SIG w3.8: v1(427.6,567.75) 443.97,551.38 829.3,551.38 1054.61,326.08 1460.76,326.08 1478.26,343.58 1478.26,638.98 1659.09,819.81 1720.24,819.81 v1(1744.21,843.78)
QDR0.Q14: U2.F10 U5.J11 | length 2077.9
  L1 TOP w5: v1(388.23,528.38) U2.F10@407.91,548.07 ; v1(1980.43,686.3) U5.J11@2000.12,705.98
  L7 SIG w3.8: v1(388.23,528.38) 407.4,509.21 429.18,509.21 446.55,491.84 446.55,487.66 464.27,469.94 468.45,469.94 486.23,452.16 486.23,408.6 503.97,390.86 508.16,390.86 525.89,373.13 525.89,368.95 543.62,351.22 900.37,351.22 963.52,288.07 1476.5,288.07 1546.86,358.43 1546.86,460.49 1645.62,559.25 1652.63,559.25 1659.09,552.79 1671.85,552.79 1678.31,559.25 1692,559.25 1698.46,552.79 1711.22,552.79 1717.68,559.25 1731.37,559.25 1737.83,552.79 1750.59,552.79 1757.05,559.25 1770.74,559.25 1777.2,552.79 1789.96,552.79 1796.42,559.25 1810.11,559.25 1816.57,552.79 1829.33,552.79 1839.32,562.78 1839.32,645.71 1858.13,664.51 1958.64,664.51 v1(1980.43,686.3)
QDR0.Q15: U2.E9 U5.F14 | length 1929.5
  L1 TOP w5: v1(427.6,489.01) U2.E9@447.28,508.7 ; v1(1862.32,804.41) U5.F14@1882.01,824.09
  L3 SIG w3.8: v1(427.6,489.01) 451.57,465.04 855.13,465.04 1016.9,303.27 1470.2,303.27 1510.42,343.49 1510.42,592.39 1659.09,741.07 1713.4,741.07 1727.85,755.52 1727.85,770.46 1737.83,780.44 1792.14,780.44 1799.74,788.04 1828.36,788.04 1844.73,804.41 v1(1862.32,804.41)
QDR0.Q16: U2.D9 U5.D13 | length 1811.7
  L1 TOP w5: v1(427.6,449.64) U2.D9@447.28,469.33 ; v1(1783.58,765.04) U5.D13@1803.27,784.72
  L3 SIG w3.8: v1(427.6,449.64) 443.01,434.23 865.77,434.23 1004.33,295.67 1473.35,295.67 1521.14,343.46 1521.14,563.74 1659.09,701.7 1742.02,701.7 1761.31,720.99 1761.31,742.77 v1(1783.58,765.04)
QDR0.Q17: U2.B10 U5.K14 | length 2131.5
  L1 TOP w5: v1(388.23,370.9) U2.B10@407.91,390.59 ; v1(2019.8,804.41) U5.K14@2039.49,824.09
  L7 SIG w3.8: v1(388.23,370.9) 410.5,348.63 471.65,348.63 490.94,329.34 490.94,325.15 535.62,280.47 1479.65,280.47 1559.72,360.55 1559.72,462.6 1636.72,539.6 1643.73,539.6 1655.94,551.82 1675,551.82 1678.31,548.5 1692,548.5 1695.31,551.82 1714.37,551.82 1717.68,548.5 1731.37,548.5 1734.68,551.82 1753.74,551.82 1757.05,548.5 1770.74,548.5 1774.05,551.82 1793.11,551.82 1796.42,548.5 1810.11,548.5 1813.42,551.82 1832.48,551.82 1835.79,548.5 1846.92,559.63 1846.92,574.57 1862.36,590 1984.66,590 2000.09,605.44 2000.09,784.7 v1(2019.8,804.41)
QDR0.Q18: U2.B2 U5.H21 | length 1982.8
  L1 TOP w5: U2.B2@722.88,390.59 v1(742.56,370.9) ; v1(1941.06,1080) U5.H21@1960.75,1099.69
  L3 SIG w3.8: v1(742.56,370.9) 758.92,354.55 884.94,354.55 966.62,272.87 1482.8,272.87 1553.29,343.37 1553.29,466.92 1645.62,559.25 1652.63,559.25 1659.09,552.79 1671.85,552.79 1678.31,559.25 1692,559.25 1698.46,552.79 1711.22,552.79 1717.68,559.25 1731.37,559.25 1737.83,552.79 1750.59,552.79 1757.05,559.25 1770.74,559.25 1777.2,552.79 1789.96,552.79 1796.42,559.25 1810.11,559.25 1816.57,552.79 1829.33,552.79 1839.32,562.78 1839.32,763.82 1855.94,780.44 1870.88,780.44 1886.14,795.7 1886.14,889.38 1901.41,904.65 1905.6,904.65 1921.35,920.4 1921.35,1060.29 v1(1941.06,1080)
QDR0.Q19: U2.D3 U5.D20 | length 1886.7
  L1 TOP w5: U2.D3@683.51,469.33 v1(703.19,449.64) ; v1(1783.58,1040.63) U5.D20@1803.27,1060.32
  L8 SIG w3.8: v1(703.19,449.64) 727.15,425.69 941.55,425.69 1056.36,310.87 1467.06,310.87 1502.46,346.28 1502.46,910.14 1655.94,1063.63 1670.88,1063.63 1684.67,1077.42 1684.67,1081.61 1698.46,1095.4 1750.59,1095.4 1765.59,1080.4 1765.59,1058.62 v1(1783.58,1040.63)
QDR0.Q20: U2.E3 U5.J20 | length 2006.5
  L1 TOP w5: U2.E3@683.51,508.7 v1(703.19,489.01) ; v1(1980.43,1040.63) U5.J20@2000.12,1060.32
  L4 SIG w3.8: v1(703.19,489.01) 718.59,473.61 835.7,473.61 1013.64,295.67 1473.35,295.67 1516.19,338.51 1516.19,648.28 1655.94,788.04 1670.88,788.04 1680.88,798.04 1680.88,852.34 1696.28,867.74 1711.21,867.74 1720.26,876.78 1720.26,999.08 1739.54,1018.36 1958.17,1018.36 v1(1980.43,1040.63)
QDR0.Q21: U2.F2 U5.K20 | length 2033.6
  L1 TOP w5: U2.F2@722.88,548.07 v1(742.56,528.38) ; v1(2019.8,1040.63) U5.K20@2039.49,1060.32
  L4 SIG w3.8: v1(742.56,528.38) 757.96,543.78 821.38,543.78 1046.69,318.48 1463.91,318.48 1486.51,341.07 1486.51,736.71 1655.94,906.15 1670.88,906.15 1680.88,916.15 1680.88,1009.83 1696.28,1025.22 1711.21,1025.22 1724.52,1038.53 1724.52,1042.72 1737.83,1056.03 2004.4,1056.03 v1(2019.8,1040.63)
QDR0.Q22: U2.G3 U5.K21 | length 2064.4
  L1 TOP w5: U2.G3@683.51,587.44 v1(703.19,567.75) ; v1(2019.8,1080) U5.K21@2039.49,1099.69
  L7 SIG w3.8: v1(703.19,567.75) 721.28,549.66 743.06,549.66 758.22,534.51 758.22,480.2 773.37,465.04 883.37,465.04 1029.93,318.48 1463.91,318.48 1495.41,349.98 1495.41,538.02 1659.09,701.7 1674.03,701.7 1688.86,716.53 1688.86,770.83 1703.69,785.66 1707.88,785.66 1722.91,800.7 1722.91,844.26 1738.37,859.71 1742.56,859.71 1759.61,876.77 1759.61,959.7 1777.2,977.29 1781.39,977.29 1798.98,994.88 1798.98,1038.44 1818.27,1057.73 1997.53,1057.73 v1(2019.8,1080)
QDR0.Q23: U2.K3 U5.G22 | length 55.7
  L1 TOP w5: U2.K3@683.51,705.55 v1(703.19,725.24) ; v1(1901.69,1158.74) U5.G22@1921.38,1139.06
QDR0.Q24: U2.L2 U5.F22 | length 55.7
  L1 TOP w5: U2.L2@722.88,744.92 v1(742.56,764.61) ; v1(1862.32,1158.74) U5.F22@1882.01,1139.06
QDR0.Q25: U2.N3 U5.C23 | length 55.7
  L1 TOP w5: U2.N3@683.51,823.66 v1(703.19,843.35) ; v1(1744.21,1198.11) U5.C23@1763.9,1178.43
QDR0.Q26: U2.P3 U5.C24 | length 55.7
  L1 TOP w5: U2.P3@683.51,863.03 v1(703.19,882.72) ; v1(1744.21,1237.48) U5.C24@1763.9,1217.8
QDR0.Q27: U2.B1 U5.J21 | length 1891.9
  L1 TOP w5: U2.B1@762.25,390.59 v1(781.93,370.9) ; v1(1980.43,1080) U5.J21@2000.12,1099.69
  L8 SIG w3.8: v1(781.93,370.9) 942.54,370.9 1032.97,280.47 1479.65,280.47 1540.49,341.32 1540.49,593.85 1655.94,709.3 1670.88,709.3 1680.89,719.3 1680.89,773.61 1696.28,789.01 1711.22,789.01 1725.01,802.79 1725.01,846.35 1738.79,860.14 1782.35,860.14 1799,876.78 1799,959.71 1818.63,979.34 1822.81,979.34 1842.44,998.97 1842.44,1003.16 1860.96,1021.68 1943.89,1021.68 1960.19,1037.98 1960.19,1059.76 v1(1980.43,1080)
QDR0.Q28: U2.C2 U5.A20 | length 1658.5
  L1 TOP w5: U2.C2@722.88,429.96 v1(742.56,410.27) ; v1(1665.47,1040.63) U5.A20@1685.16,1060.32
  L8 SIG w3.8: v1(742.56,410.27) 760.15,410.27 775.55,394.87 945.47,394.87 1044.67,295.67 1473.35,295.67 1521.47,343.8 1521.47,896.63 v1(1665.47,1040.63)
QDR0.Q29: U2.E1 U5.C21 | length 1696.6
  L1 TOP w5: U2.E1@762.25,508.7 v1(781.93,489.01) ; v1(1744.21,1080) U5.C21@1763.9,1099.69
  L7 SIG w3.8: v1(781.93,489.01) 895.87,489.01 1051.21,333.68 1457.61,333.68 1469.69,345.75 1469.69,866.62 1659.09,1056.03 1720.24,1056.03 v1(1744.21,1080)
QDR0.Q30: U2.F1 U5.B20 | length 1691.3
  L1 TOP w5: U2.F1@762.25,548.07 v1(781.93,528.38) ; v1(1704.84,1040.63) U5.B20@1724.53,1060.32
  L7 SIG w3.8: v1(781.93,528.38) 766.53,512.98 766.53,482.64 775.55,473.61 899,473.61 1046.54,326.08 1460.76,326.08 1482.55,347.87 1482.55,535.9 1655.94,709.3 1670.88,709.3 1681.05,719.47 1681.05,1016.84 v1(1704.84,1040.63)
QDR0.Q31: U2.J2 U5.B24 | length 55.7
  L1 TOP w5: U2.J2@722.88,666.18 v1(742.56,685.87) ; v1(1704.84,1237.48) U5.B24@1724.53,1217.8
QDR0.Q32: U2.K1 U5.J22 | length 55.7
  L1 TOP w5: U2.K1@762.25,705.55 v1(781.93,725.24) ; v1(1980.43,1158.74) U5.J22@2000.12,1139.06
QDR0.Q33: U2.L1 U5.H23 | length 55.7
  L1 TOP w5: U2.L1@762.25,744.92 v1(781.93,764.61) ; v1(1941.06,1198.11) U5.H23@1960.75,1178.43
QDR0.Q34: U2.M2 U5.A22 | length 55.7
  L1 TOP w5: U2.M2@722.88,784.29 v1(742.56,803.98) ; v1(1665.47,1158.74) U5.A22@1685.16,1139.06
QDR0.Q35: U2.P1 U5.E23 | length 55.7
  L1 TOP w5: U2.P1@762.25,863.03 v1(781.93,882.72) ; v1(1822.95,1198.11) U5.E23@1842.64,1178.43
QDR0.RDN: U2.A8 U5.L16 | length 2151.5
  L1 TOP w5: v1(466.97,331.53) U2.A8@486.65,351.22 ; v1(2059.17,883.15) U5.L16@2078.86,902.83
  L4 SIG w3.8: v1(466.97,331.53) 548.43,250.07 1492.24,250.07 1575.55,333.38 1575.55,467.68 1652.09,544.22 1831.51,544.22 1845.95,558.66 1845.95,652.34 1856.9,663.29 1939.83,663.29 1957.52,680.97 1957.52,803.27 1975.2,820.95 1979.39,820.95 1997.64,839.21 1997.64,843.4 2016.08,861.84 2037.86,861.84 v1(2059.17,883.15)
QDR0.WRN: U2.A4 U5.J18 | length 1980.4
  L1 TOP w5: U2.A4@644.14,351.22 v1(663.82,331.53) ; v1(1980.43,961.89) U5.J18@2000.12,981.57
  L3 SIG w3.8: v1(663.82,331.53) 730.08,265.27 1485.94,265.27 1564.01,343.34 1564.01,466.89 1636.01,538.89 1643.02,538.89 1655.94,551.82 1675,551.82 1678.31,548.5 1692,548.5 1695.31,551.82 1714.37,551.82 1717.68,548.5 1731.37,548.5 1734.68,551.82 1753.74,551.82 1757.05,548.5 1770.74,548.5 1774.05,551.82 1793.11,551.82 1796.42,548.5 1810.11,548.5 1813.42,551.82 1832.48,551.82 1835.79,548.5 1846.92,559.63 1846.92,653.31 1864.5,670.89 1947.43,670.89 1956.47,679.93 1956.47,937.93 v1(1980.43,961.89)
QDR0_TCK: U2.R2 | length 27.8
  L1 TOP w5: U2.R2@722.88,902.4 v1(742.56,922.09)
QDR0_TDI: U2.R11 | length 27.8
  L1 TOP w5: v1(348.86,922.09) U2.R11@368.54,902.4
QDR0_TDO: U2.R1
QDR0_TMS: U2.R10 | length 27.8
  L1 TOP w5: v1(388.23,922.09) U2.R10@407.91,902.4
QDR1.A0: U1.B4 U5.C30 | length 1801.8
  L1 TOP w5: U1.B4@638.86,1253.11 v1(658.54,1233.42) ; v1(1744.21,1473.7) U5.C30@1763.9,1454.02
  L3 SIG w3.8: v1(658.54,1233.42) 674.91,1249.79 674.91,1321.69 689.34,1336.12 1234.64,1336.12 1239.4,1340.88 1239.4,1376.08 1244.16,1380.84 1258.44,1380.84 1263.2,1376.08 1263.2,1340.88 1267.96,1336.12 1282.24,1336.12 1287,1340.88 1287,1423.68 1291.76,1428.44 1306.04,1428.44 1310.8,1423.68 1310.8,1340.88 1315.56,1336.12 1322.7,1336.12 1361.53,1374.96 1373.43,1374.96 1378.48,1380.01 1378.48,1386.74 1334.73,1430.49 1334.73,1437.22 1344.83,1447.32 1351.56,1447.32 1395.31,1403.57 1402.04,1403.57 1412.14,1413.66 1412.14,1420.4 1402.04,1430.49 1402.04,1437.22 1412.14,1447.32 1418.87,1447.32 1428.97,1437.23 1435.7,1437.23 1449.17,1450.69 1478.44,1450.69 1483.2,1445.93 1483.2,1430.32 1487.96,1425.56 1502.24,1425.56 1507,1430.32 1507,1445.93 1511.76,1450.69 1526.04,1450.69 1530.8,1445.93 1530.8,1430.32 1535.56,1425.56 1549.84,1425.56 1554.6,1430.32 1554.6,1445.93 1559.36,1450.69 1573.64,1450.69 1578.4,1445.93 1578.4,1443.43 1583.16,1438.67 1597.44,1438.67 1602.2,1443.43 1602.2,1445.93 1606.96,1450.69 1621.24,1450.69 1630.76,1441.17 1645.04,1441.17 1654.56,1450.69 1721.2,1450.69 v1(1744.21,1473.7)
QDR1.A1: U1.B8 U5.A30 | length 1930.4
  L1 TOP w5: v1(461.69,1233.42) U1.B8@481.38,1253.11 ; v1(1665.47,1473.7) U5.A30@1685.16,1454.02
  L3 SIG w3.8: v1(461.69,1233.42) 485.66,1257.39 546.81,1257.39 580.29,1290.87 580.29,1334.43 613.77,1367.9 786.18,1367.9 891.98,1473.7 984.61,1473.7 989.37,1468.94 989.37,1378.46 994.13,1373.7 1008.41,1373.7 1013.17,1378.46 1013.17,1468.94 1017.93,1473.7 1032.21,1473.7 1036.97,1468.94 1036.97,1378.46 1041.73,1373.7 1056.01,1373.7 1060.77,1378.46 1060.77,1468.94 1065.53,1473.7 1079.81,1473.7 1084.57,1468.94 1084.57,1388.78 1089.33,1384.02 1103.61,1384.02 1108.37,1388.78 1108.37,1468.94 1113.13,1473.7 v1(1665.47,1473.7)
QDR1.A2: U1.C5 U5.G28 | length 1801.8
  L1 TOP w5: U1.C5@599.49,1292.48 v1(619.17,1272.79) ; v1(1901.69,1394.96) U5.G28@1921.38,1375.28
  L3 SIG w3.8: v1(619.17,1272.79) 635.54,1256.42 635.54,1223.9 649.99,1209.45 664.92,1209.45 673.94,1200.43 673.94,1185.5 688.39,1171.05 1577.26,1171.05 1659.09,1252.88 1899.5,1252.88 1918.7,1272.08 1918.7,1276.27 1937.36,1294.93 1941.55,1294.93 1959.81,1313.19 1959.81,1317.38 1976.73,1334.3 1980.92,1334.3 1997.67,1351.05 1997.67,1355.24 2014.34,1371.91 2018.53,1371.91 2035.2,1388.58 2035.2,1401.34 2018.58,1417.96 1924.69,1417.96 v1(1901.69,1394.96)
QDR1.A3: U1.C7 U5.E28 | length 1837.4
  L1 TOP w5: v1(501.06,1272.79) U1.C7@520.75,1292.48 ; v1(1822.95,1394.96) U5.E28@1842.64,1375.28
  L7 SIG w3.8: v1(501.06,1272.79) 516.46,1257.39 834.72,1257.39 917.5,1340.18 1238.68,1340.18 1243.44,1335.42 1243.44,1262.15 1248.2,1257.39 1262.48,1257.39 1267.24,1262.15 1267.24,1335.42 1272,1340.18 1286.28,1340.18 1291.04,1335.42 1291.04,1262.15 1295.8,1257.39 1310.08,1257.39 1314.84,1262.15 1314.84,1335.42 1319.6,1340.18 1333.88,1340.18 1338.64,1335.42 1338.64,1307.53 1343.4,1302.77 1357.68,1302.77 1362.44,1307.53 1362.44,1335.42 1367.2,1340.18 1671.84,1340.18 1681.83,1350.17 1681.83,1365.11 1695.47,1378.75 1710.41,1378.75 1724.05,1392.39 1724.05,1396.58 1737.83,1410.36 1807.55,1410.36 v1(1822.95,1394.96)
QDR1.A4: U1.N5 U5.F38 | length 1428.9
  L1 TOP w5: U1.N5@599.49,1686.18 v1(619.17,1705.87) ; v1(1862.32,1788.66) U5.F38@1882.01,1768.98
  L3 SIG w3.8: v1(619.17,1705.87) 637.17,1723.86 637.17,1745.64 652.18,1760.65 1098.86,1760.65 1103.62,1755.89 1103.62,1745.7 1108.38,1740.94 1122.66,1740.94 1127.42,1745.7 1127.42,1755.89 1132.18,1760.65 1146.46,1760.65 1151.22,1755.89 1151.22,1745.7 1155.98,1740.94 1170.26,1740.94 1175.02,1745.7 1175.02,1755.89 1179.78,1760.65 1194.06,1760.65 1198.82,1755.89 1198.82,1746.58 1203.58,1741.82 1217.86,1741.82 1222.62,1746.58 1222.62,1755.89 1227.38,1760.65 1234.52,1760.65 1238.98,1765.11 1838.77,1765.11 v1(1862.32,1788.66)